# EAGLE board untitled (EAGLE 9.6.2)
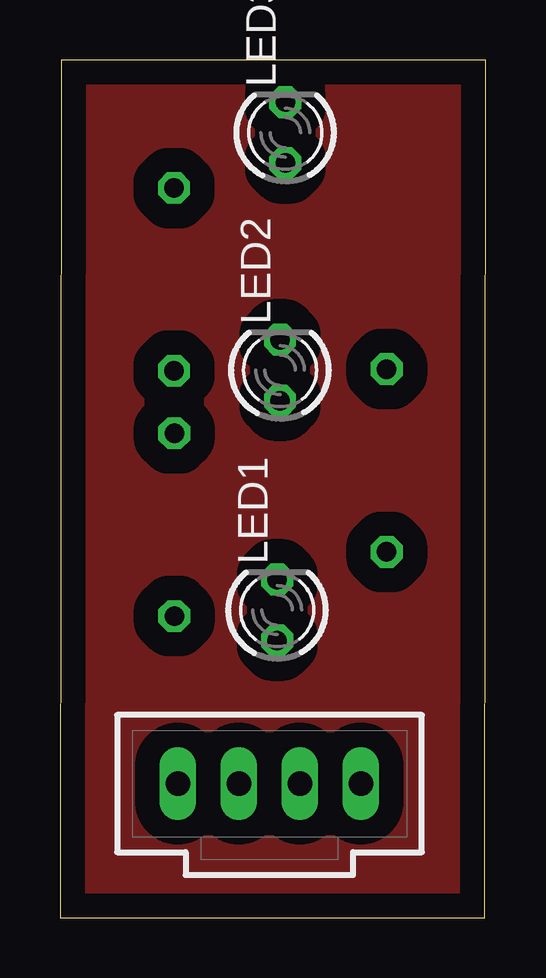
[diagram p0: board, top side]
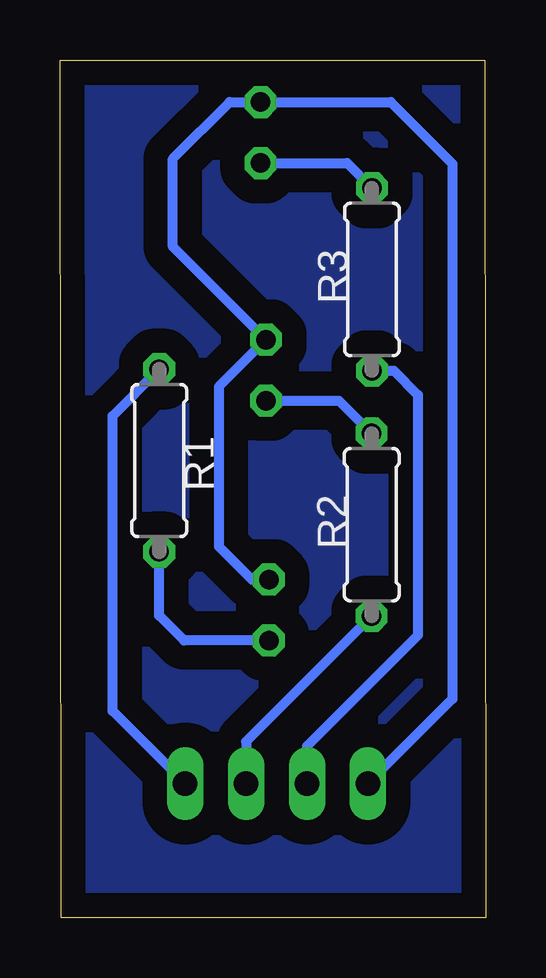
[diagram p1: board, bottom side, seen from below]

Size 17.75 x 35.76 mm. Coordinates in mm from the lower left corner, seen from the top.
Outline: 0,0 17.7,0 17.75,35.76 0.05,35.76 0,0
Copper layers (1*16): Top 0.035mm / dielectric 1.5mm / Bottom 0.035mm
Design rules "default": minimum track width 6mil, minimum drill 0.35mm, track to track 6mil, track to pad 6mil, pad to pad 6mil, via to via 6mil, smd to smd 6mil, copper to edge 40mil, drill to drill 6mil, minimum pad ring 10mil, minimum via ring 8mil, stop-mask expansion 4mil, vias tented up to drill 0mil, thermal gap 10mil

## Footprints (pad centres in the part's own frame; a part is rotated, then mirrored left to right if it is on the bottom)
LED3MM = drill 0.813 octagon: A -1.27,0; K 1.27,0
0207/7 = drill 0.813 octagon: 1 -3.81,0; 2 3.81,0
70543-04 = drill 1.016 long: 1 -3.81,0; 2 -1.27,0; 3 1.27,0; 4 3.81,0

## Placement (x,y rotation side)
LED1  TLLY4400  [LED3MM]  9.05,12.83 90 top
LED2  TLLY4400  [LED3MM]  9.17,22.83 90 top
LED3  TLLY4400  [LED3MM]  9.39,32.73 90 top
R1  [0207/7]  13.61,19.06 270 bottom
R2  [0207/7]  4.76,16.39 90 bottom
R3  [0207/7]  4.75,26.61 90 bottom
X1  C-GRID-04-70543  [70543-04]  8.73,5.59 0 top

## Library data of the parts
LED1-LED3 = led; MF: VISHAY SEMICONDUCTOR; OC_FARNELL: 1612439
R1-R3 = rcl; SPICEPREFIX: R
X1 = con-molex; MF: MOLEX; OC_FARNELL: unknown; OC_NEWARK: unknown

## Nets
N$1: R1.1 X1.4
N$2: R2.1 X1.3
N$3: R3.1 X1.2
N$4: LED1.A R1.2
N$5: LED2.A R2.2
N$6: LED3.A R3.2
N$7: LED1.K LED2.K LED3.K X1.1

## Tracks (layer width: path | path; a pad name or v marks a point on that pad's centre or on a via)
N$1
  Bottom 0.406: X1.4 15.56,8.62 15.56,20.92 R1.1
N$2
  Bottom 0.406: R2.1 10,7.34 X1.3
N$3
  Bottom 0.406: R3.1 3.84,22.8 2.84,21.8 2.84,11.78 7.46,7.16 X1.2
N$4
  Bottom 0.406: LED1.A 12.58,11.56 13.61,12.6 R1.2
N$5
  Bottom 0.406: LED2.A 6.13,21.56 R2.2
N$6
  Bottom 0.406: LED3.A 5.79,31.46 R3.2
N$7
  Bottom 0.406: LED1.K 9.75,14.1 11.13,15.47 11.13,22.14 LED2.K 13.04,27.97 13.04,31.64 10.68,34 LED3.K 3.96,34 1.4,31.43 1.4,9.11 X1.1
N$8
  pour Bottom (isolate 1.016): 0.05,35.76 0.05,-0.03 17.75,-0.03 17.75,35.76
N$9
  pour Top (isolate 1.016): 0.05,35.76 0.05,-0.03 17.75,-0.03 17.75,35.76